# Allegro board leddriver.brd
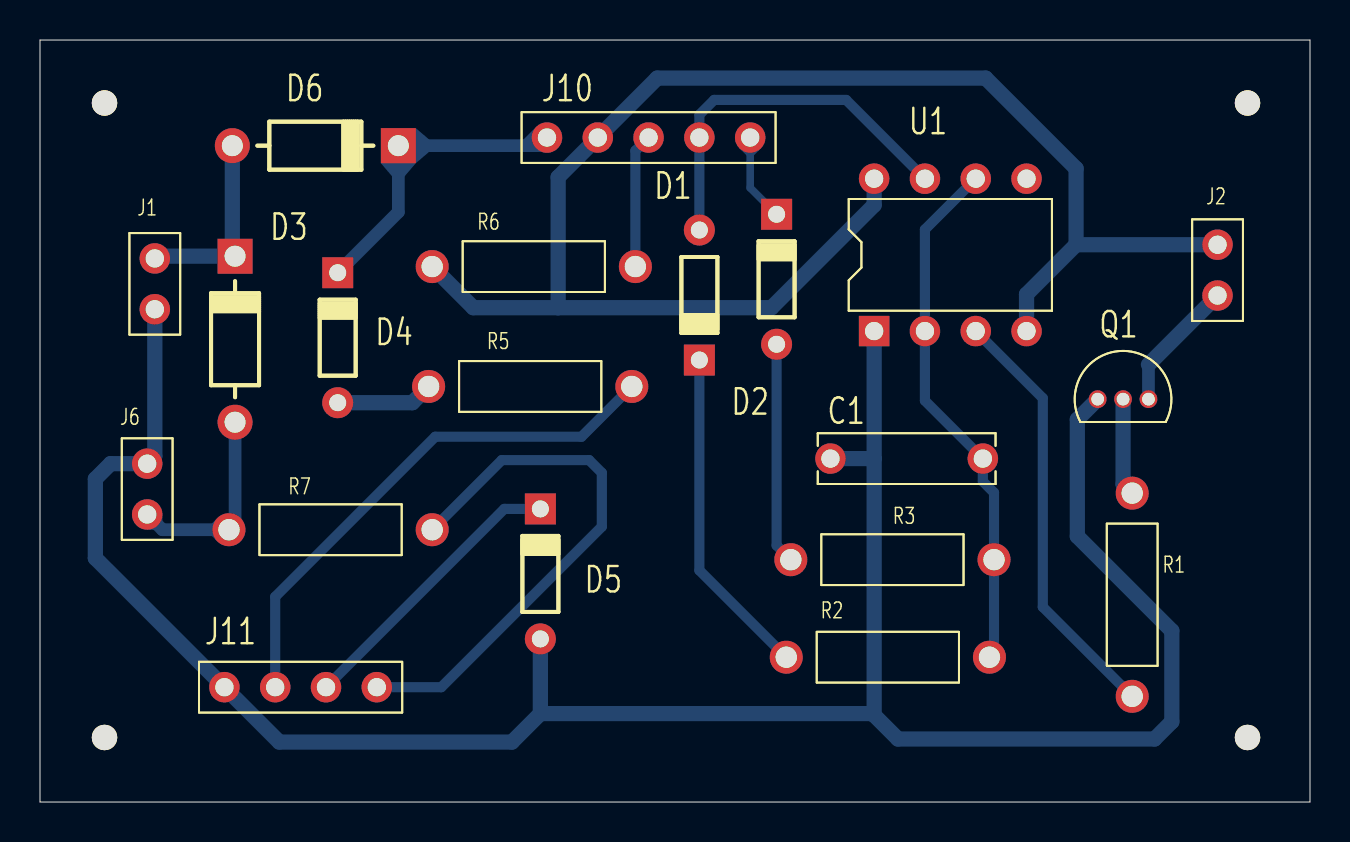
[diagram p0: board, top side]
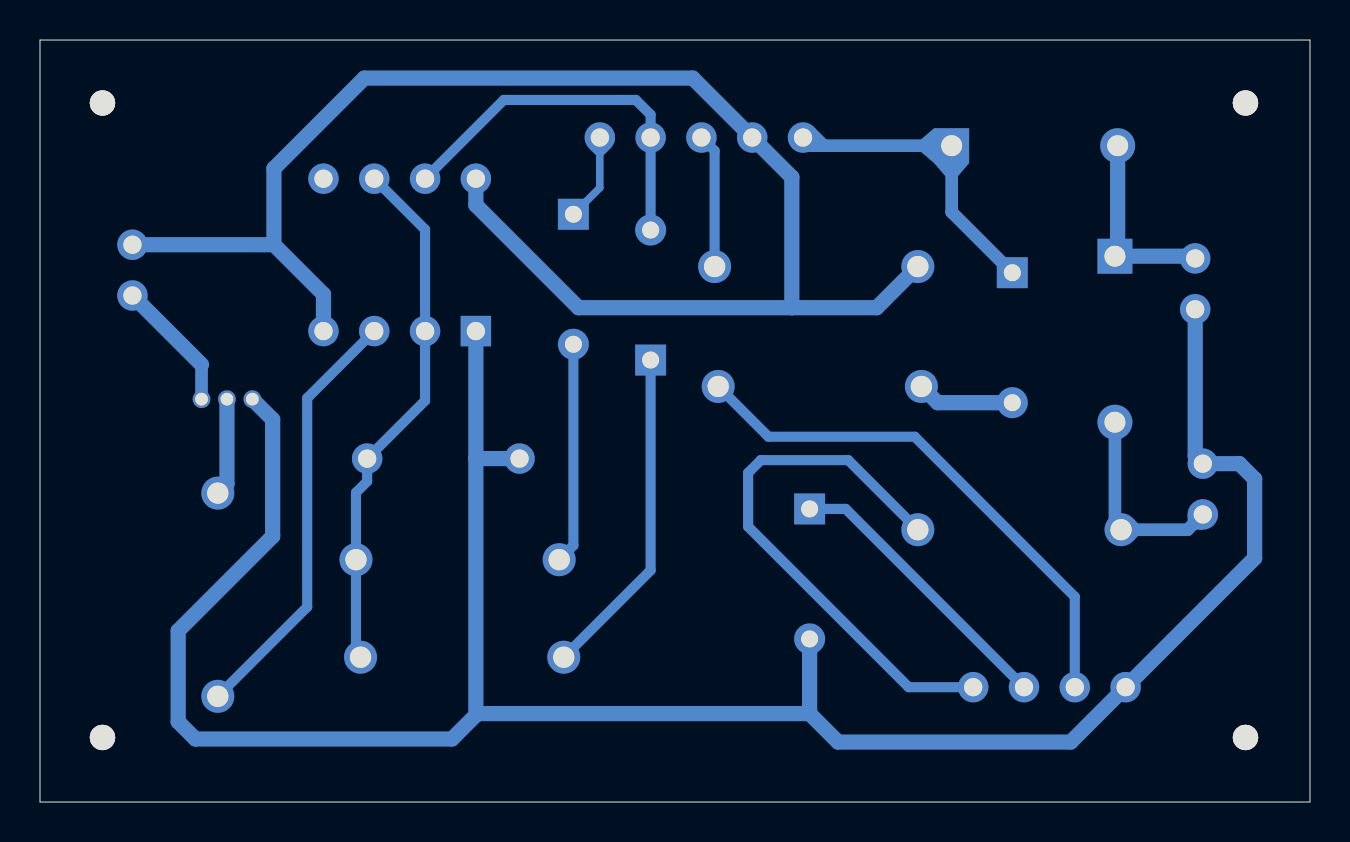
[diagram p1: board, bottom side, seen from below]

Outline 63.5 x 38.1 mm; copper layers: TOP, BOTTOM. Coordinates in mm from the lower left corner of the outline.
Outline path: 0,38.1 63.5,38.1 63.5,0 0,0 0,38.1

## Design rules (mm)
nets with their own width: min track width 0.635; nets 0 N02122 N13303 N14006 N14380 N17059

## Placement (name value [footprint] x y rotation side)
C1  10n  [CAP300]  47.14 17.17 180 top
D1  1N4148  [DO_35]  32.97 25.35 90 top
D2  1N4148  [DO_35]  36.83 26.14 270 top
D3  1N5819  [DO_41]  9.75 23.14 270 top
D4  1N4692  [DO_35]  14.88 23.22 270 top
D5  1N4688  [DO_35]  25.02 11.4 270 top
D6  1N5819  [DO_41]  13.77 32.82 180 top
J1  Battery  [JUMPER2]  5.74 24.64 90 top
J2  CONN PWR 2-P  [JUMPER2]  58.88 27.86 270 top
J6  PV panel  [JUMPER2]  5.36 16.92 270 top
J10  CON5  [JUMPER5]  25.35 33.22 0 top
J11  LEDS  [JUMPER4]  9.22 5.74 0 top
NOREF  -  [unnamed]  60.38 3.23 0 top
NOREF#2  -  [unnamed]  60.38 34.95 0 top
NOREF#3  -  [unnamed]  3.23 34.95 0 top
NOREF#4  -  [unnamed]  3.23 3.23 0 top
Q1  2N2222  [TO92]  52.88 20.14 90 top
R1  1k  [RES400]  54.61 5.28 0 top
R2  1k  [RES400]  47.47 7.24 90 top
R3  1k  [RES400]  47.7 12.12 90 top
R5  1k  [RES400]  29.59 20.78 90 top
R6  1k  [RES400]  19.61 26.77 270 top
R7  1k  [RES400]  9.45 13.61 270 top
U1  555D  [DIP8_3]  41.71 23.55 90 top

## Library data of the parts
C1 = CAPACITOR: Tolerance: ***; User Part Number: ***
D1 D2 = 1N4148_1
D3 D6 = 1N5819_3
D4 D5 = 1N4617_2
J1 J2 J6 = CONN PWR 2-P: User Part Number: ***
J10 = CON5: User Part Number: ***
J11 = CON4: User Part Number: ***
Q1 = 2N2222
R1 = RESISTOR: Tolerance: ***; User Part Number: ***
R2 R3 R5-R7 = R: Tolerance: ***; User Part Number: ***
U1 = 555D: Tolerance: ***; User Part Number: ***

## Footprints (pads in the part's own frame, mm; a bottom-side part is the same pattern mirrored in y, then rotated)
CAP300
  round 1.524 hole 0.914: 1(0,0) 2(7.62,0)
DIP8_3
  rect 1.524x1.524 hole 0.914: 1(0,0)
  round 1.524 hole 0.914: 2(0,-2.54) 3(0,-5.08) 4(0,-7.62) 5(7.62,-7.62) 6(7.62,-5.08) 7(7.62,-2.54) 8(7.62,0)
DO_35
  round 1.55 hole 0.85: A(3.25,0)
  rect 1.55x1.55 hole 0.85: C(-3.25,0)
DO_41
  round 1.75 hole 1.05: A(4.15,0)
  rect 1.75x1.75 hole 1.05: C(-4.15,0)
JUMPER2
  round 1.524 hole 0.914: 1(0,0) 2(2.54,0)
JUMPER4
  round 1.524 hole 0.914: 1(0,0) 2(2.54,0) 3(5.08,0) 4(7.62,0)
JUMPER5
  round 1.524 hole 0.914: 1(0,0) 2(2.54,0) 3(5.08,0) 4(7.62,0) 5(10.16,0)
RES400
  round 1.651 hole 1.067: 1(0,0) 2(0,10.16)
TO92
  round 0.889 hole 0.635: 1(0,0) 2(0,-1.27) 3(0,-2.54)
unnamed
  round 1.27 hole 3.962 unplated: (0,0)

## Nets
0: C1.2(B) D5.A J1.1 J6.1 J11.1 Q1.1(E) U1.1(GND)
N01183: U1.5(CONTROL)
N02122: J2.1 J10.2 R6.1 U1.4(RESET) U1.8(VCC)
N04012: R1.1(A) U1.3(OUTPUT)
N04016: Q1.2(B) R1.2(B)
N06043: C1.1(A) R2.1 R3.1 U1.2(TRIGGER) U1.6(THRESHOLD)
N08506: D1.A J10.4 U1.7(DISCHARGE)
N08717: D2.A R3.2
N09035: D2.C J10.5
N10993: J10.3 R6.2
N13303: D4.C D6.C J10.1
N14006: J2.2 Q1.3(C)
N14196: D4.A R5.2
N14380: D3.A J6.2 R7.1
N15547: D5.C J11.3
N15675: J11.2 R5.1
N17059: D3.C D6.A J1.2
N17462: D1.C R2.2
N18300: J11.4 R7.2

## Routing (per net, layer and track width the routed paths; a pad name or vN(x,y) marks a point on that pad's centre or on a via; arc(x,y) is an arc through that point)
0: length 117.5
  BOTTOM w0.762: U1.1 41.71,17.17 ; 41.71,17.17 C1.2 ; 41.71,17.17 41.71,4.34 ; 25.02,4.42 41.63,4.42 41.71,4.34 ; 25.02,4.42 23.6,3 11.96,3 J11.1 2.77,12.19 2.77,16.15 3.53,16.92 J6.1 5.74,17.3 J1.1 ; 25.02,4.42 D5.A ; 41.71,4.34 42.9,3.15 55.73,3.15 56.59,4.01 56.59,8.56 51.87,13.28 51.87,19.13 Q1.1
N02122: length 79
  BOTTOM w0.762: U1.4 49.33,25.39 51.8,27.86 ; R6.1 21.67,24.71 25.91,24.71 ; J2.1 51.8,27.86 ; 51.8,27.86 51.8,31.67 47.28,36.2 30.86,36.2 J10.2 25.91,31.24 25.91,24.71 ; 25.91,24.71 36.58,24.71 41.71,29.84 U1.8
N04012: length 21.5
  BOTTOM w0.508: R1.1 50.14,9.75 50.14,20.19 U1.3
N04016: length 4.9
  BOTTOM w0.762: Q1.2 54.15,15.9 R1.2
N06043: length 26.5
  BOTTOM w0.508: R2.1 47.7,7.47 R3.1 47.7,15.47 47.14,16.03 C1.1 44.25,20.07 U1.2 44.25,28.63 U1.6
N08506: length 19
  BOTTOM w0.508: U1.7 40.31,35.1 33.71,35.1 32.97,34.37 J10.4 D1.A
N08717: length 11.1
  BOTTOM w0.508: R3.2 36.83,12.83 D2.A
N09035: length 4.4
  BOTTOM w0.381: J10.5 35.51,30.71 D2.C
N10993: length 6.7
  BOTTOM w0.508: R6.2 29.77,32.56 J10.3
N13303: length 15.2
  BOTTOM w0.635: J10.1 24.94,32.82 D6.C 17.92,29.5 D4.C
N14006: length 6.6
  BOTTOM w0.635: 55.42,21.87 Q1.3
  BOTTOM w0.762: J2.2 55.42,21.87
N14196: length 4.9
  BOTTOM w0.762: D4.A 18.62,19.97 19.43,20.78
N14380: length 9.9
  BOTTOM w0.635: J6.2 6.12,13.61 R7.1 9.75,13.92 D3.A
N15547: length 14.4
  BOTTOM w0.508: D5.C 23.21,14.65 J11.3
N15675: length 26.7
  BOTTOM w0.508: R5.1 27.08,18.26 19.76,18.26 11.76,10.26 J11.2
N17059: length 9.6
  BOTTOM w0.762: J1.2 5.85,27.29 D3.C 9.62,27.43 D6.A
N17462: length 16.7
  BOTTOM w0.508: R2.2 32.97,11.58 D1.C
N18300: length 27.5
  BOTTOM w0.508: J11.4 20.07,5.74 28.09,13.77 28.09,16.46 27.46,17.09 23.09,17.09 R7.2

## Copper pours and planes (outline as drawn; the poured copper is in the pictures)
N13303 on BOTTOM (solid shape): 25.42,33.25 24.94,32.82 24.31,32.82 24.09,33.04 24.81,33.76
N13303 on BOTTOM (solid shape): 18.79,31.94 18.09,31.12 17.92,31.07 17.75,31.12 17.04,31.94 17.92,32.9
N13303 on BOTTOM (solid shape): 19.62,32.99 19.67,32.82 19.62,32.65 18.79,31.94 17.84,32.82 18.79,33.69
N09035 on BOTTOM (solid shape): 36.05,32.68 35.64,32.28 35.51,32.22 35.37,32.28 34.97,32.68 35.51,33.27
N14380 on BOTTOM (solid shape): 9.53,13.61 8.87,13.03 8.51,13.39 8.41,13.61 8.51,13.84 8.87,14.2

Small or netless copper shapes (teardrops, artwork), in the pictures only: 2 on BOTTOM

## Text on the board
User.Comments: PV+ | PV- | V- | V+ | O/P+ | O/P- | MOXIE D-SD06T
